# EAGLE board display (EAGLE 5.02)
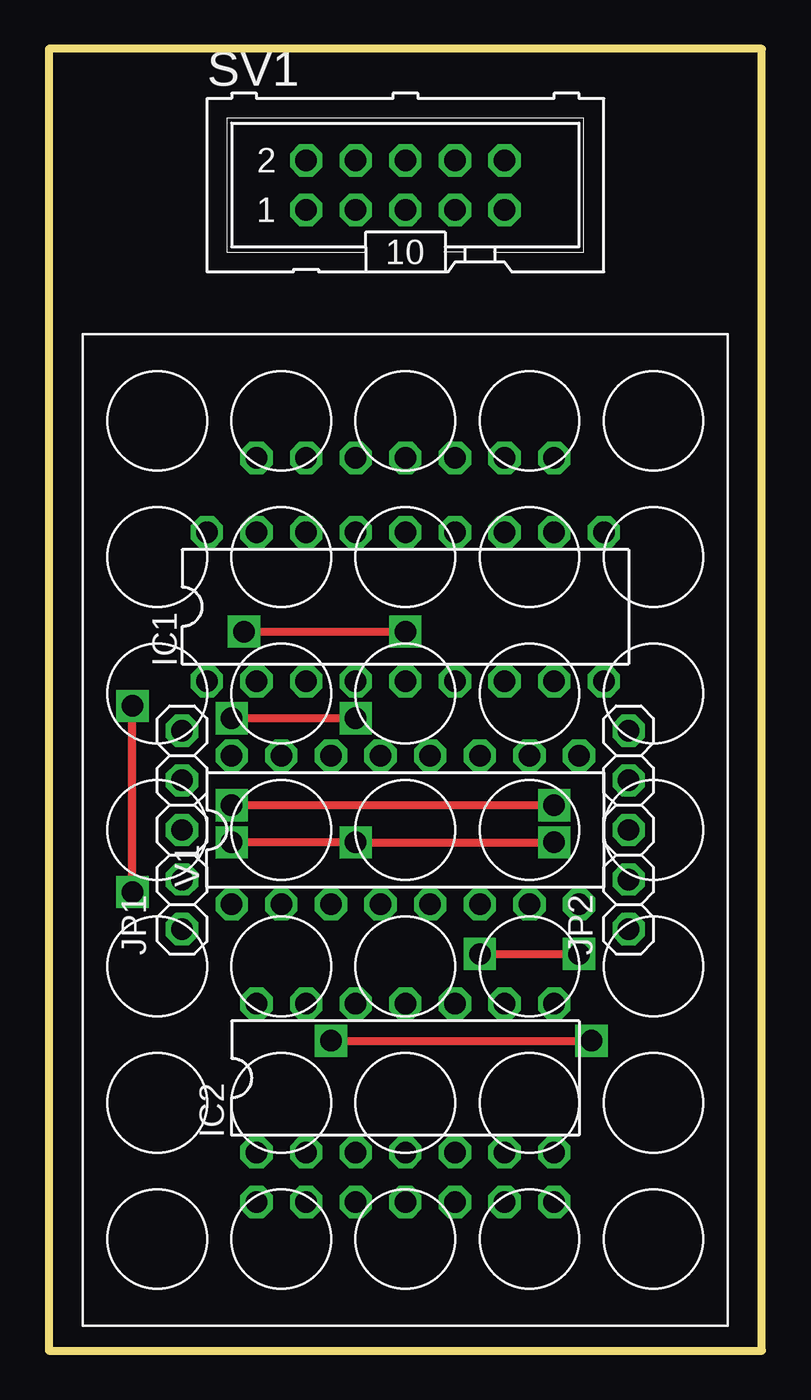
[diagram p0: board, top side]
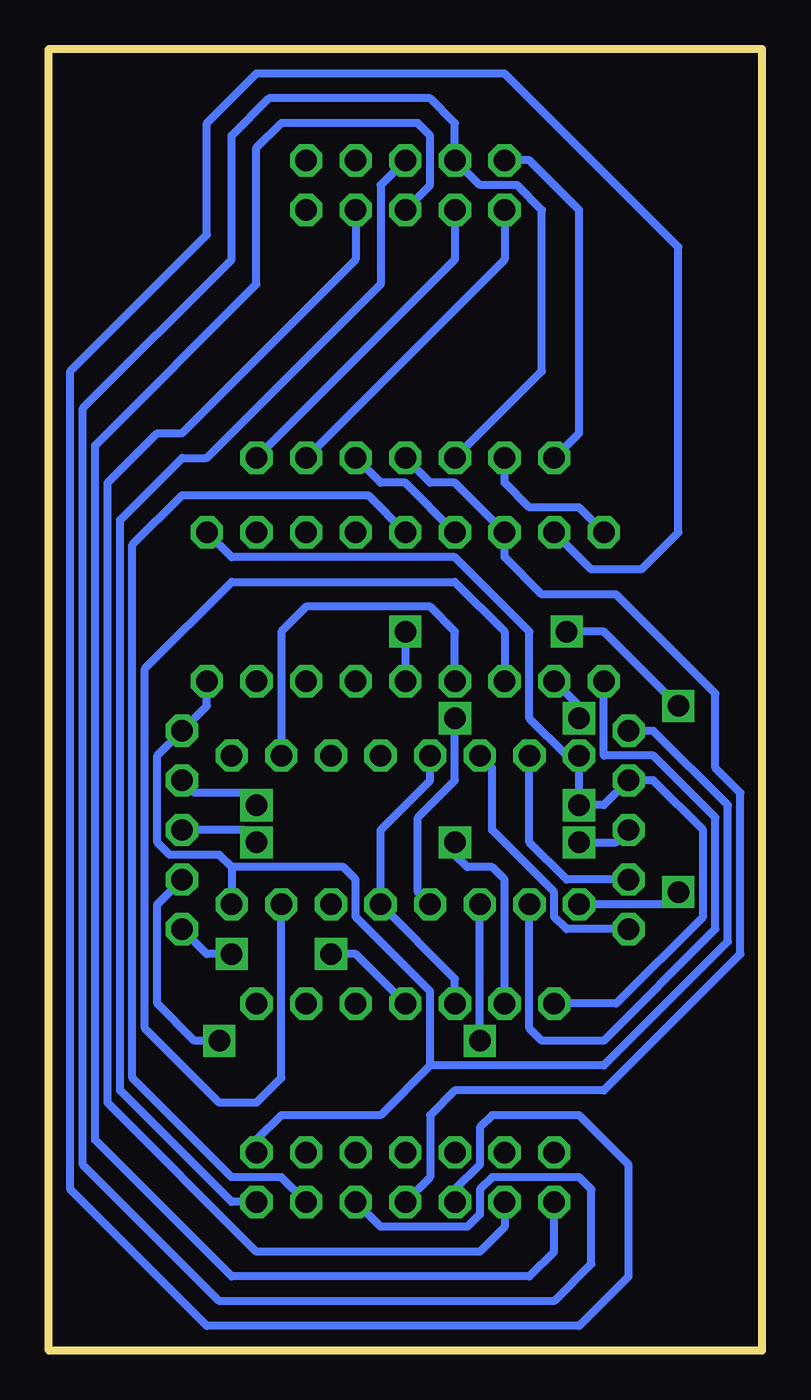
[diagram p1: board, bottom side, seen from below]

Size 36.5 x 66.67 mm. Coordinates in mm from the lower left corner, seen from the top.
Outline: 0,0 36.5,0 36.5,66.67 0,66.67 0,0
Copper layers (1*16): Top 0.035mm / dielectric 1.5mm / Bottom 0.035mm
Design rules "default": minimum track width 10mil, minimum drill 24mil, track to track 8mil, track to pad 8mil, pad to pad 8mil, via to via 8mil, smd to smd 8mil, copper to edge 40mil, drill to drill 8mil, minimum pad ring 10mil, minimum via ring 8mil, stop-mask expansion 4mil, vias tented up to drill 0mil, thermal gap 10mil

## Footprints (pad centres in the part's own frame; a part is rotated, then mirrored left to right if it is on the bottom)
DIL18 = drill 1.1 octagon: 1 -10.16,-3.81; 2 -7.62,-3.81; 3 -5.08,-3.81; 4 -2.54,-3.81; 5 0,-3.81; 6 2.54,-3.81; 7 5.08,-3.81; 8 7.62,-3.81; 9 10.16,-3.81; 10 10.16,3.81; 11 7.62,3.81; 12 5.08,3.81; 13 2.54,3.81; 14 0,3.81; 15 -2.54,3.81; 16 -5.08,3.81; 17 -7.62,3.81; 18 -10.16,3.81
DIL14 = drill 1.1 octagon: 1 -7.62,-3.81; 2 -5.08,-3.81; 3 -2.54,-3.81; 4 0,-3.81; 5 2.54,-3.81; 6 5.08,-3.81; 7 7.62,-3.81; 8 7.62,3.81; 9 5.08,3.81; 10 2.54,3.81; 11 0,3.81; 12 -2.54,3.81; 13 -5.08,3.81; 14 -7.62,3.81
1X05 = drill 1.1 octagon: 1 -5.08,0; 2 -2.54,0; 3 0,0; 4 2.54,0; 5 5.08,0
ML10 = drill 1.1 octagon: 1 -5.08,-1.27; 2 -5.08,1.27; 3 -2.54,-1.27; 4 -2.54,1.27; 5 0,-1.27; 6 0,1.27; 7 2.54,-1.27; 8 2.54,1.27; 9 5.08,-1.27; 10 5.08,1.27
DTM57 = drill 1.1 octagon: 1 -7.62,-19.05; 2 -5.08,-19.05; 3 -2.54,-19.05; 4 0,-19.05; 5 2.54,-19.05; 6 5.08,-19.05; 7 7.62,-19.05; 8 7.62,19.05; 9 5.08,19.05; 10 2.54,19.05; 11 0,19.05; 12 -2.54,19.05; 13 -5.08,19.05; 14 -7.62,19.05
DIL16 = drill 1.1 octagon: 1 -8.89,-3.81; 2 -6.35,-3.81; 3 -3.81,-3.81; 4 -1.27,-3.81; 5 1.27,-3.81; 6 3.81,-3.81; 7 6.35,-3.81; 8 8.89,-3.81; 9 8.89,3.81; 10 6.35,3.81; 11 3.81,3.81; 12 1.27,3.81; 13 -1.27,3.81; 14 -3.81,3.81; 15 -6.35,3.81; 16 -8.89,3.81

## Placement (x,y rotation side)
IC1  [DIL18]  18.25,38.09 0 top
IC2  74AC08N  [DIL14]  18.25,13.96 0 top
JP1  [1X05]  6.82,26.66 90 top
JP2  [1X05]  29.68,26.66 90 top
SV1  [ML10]  18.25,59.69 0 top
U$1  DOTMATRIX  [DTM57]  18.25,26.66 0 top
V1  744017N  [DIL16]  18.25,26.66 0 top

## Library data of the parts
IC1 IC2 JP1 JP2 SV1 U$1 V1 = display

## Nets
+5V: IC1.10 IC2.14 JP1.4 JP2.4 V1.16
GND: IC1.9 IC2.7 JP1.5 JP2.5 V1.8
N$1: SV1.1 U$1.9
N$2: SV1.2 U$1.14
N$3: SV1.3 U$1.8
N$4: SV1.4 U$1.5 U$1.12
N$5: SV1.5 U$1.1
N$6: SV1.6 U$1.7
N$7: SV1.7 U$1.2
N$8: IC1.18 U$1.13
N$9: IC1.17 U$1.3
N$10: IC1.16 U$1.4 U$1.11
N$11: IC1.15 U$1.10
N$12: IC1.14 U$1.6
N$13: JP1.2 V1.15
N$15: IC2.13 JP1.3 JP2.3
N$16: JP1.1 V1.14
N$18: JP2.2 V1.3
N$20: IC2.12 V1.5 V1.13
N$21: IC2.11 JP2.1
N$22: IC1.1 V1.2
N$23: IC1.2 V1.4
N$24: IC1.3 V1.7
N$25: IC1.4 V1.10
N$26: IC1.5 V1.1

## Tracks (layer width: path | path; a pad name or v marks a point on that pad's centre or on a via)
+5V  (via drill 1.1)
  Top 0.406: v9.36,27.94 v25.87,27.94
  Bottom 0.406: v25.87,27.94 26.5,28.57 29.04,28.57 JP2.4 | JP1.4 8.09,27.94 v9.36,27.94 V1.16 10,30.48 11.9,32.38 11.9,36.83 15.71,40.63 27.14,40.63 IC1.10 | JP1.4 6.18,29.2 | JP1.4 5.55,29.2 3.01,26.66 3.01,22.22 7.46,17.77 IC2.14
GND
  Bottom 0.406: 27.14,24.76 27.78,25.39 30.32,25.39 30.95,26.03 30.95,30.48 JP2.5 28.41,33.02 IC1.9 | 27.14,24.76 V1.8 | 27.14,24.76 21.43,24.76 20.79,24.12 20.79,22.22 16.98,18.41 16.98,14.6 | 16.98,14.6 19.52,12.06 24.6,12.06 25.87,10.79 IC2.7 | 16.98,14.6 8.09,14.6 1.74,20.95 1.74,27.94 5.55,31.74 JP1.5
N$1
  Bottom 0.406: SV1.1 13.17,55.88 U$1.9
N$2
  Bottom 0.406: U$1.14 9.36,46.98 9.36,58.42 11.9,60.95 SV1.2
N$3
  Bottom 0.406: SV1.3 15.71,55.88 U$1.8
N$4
  Bottom 0.406: U$1.5 19.52,6.34 15.07,6.34 14.44,6.98 14.44,8.25 13.81,8.88 9.36,8.88 8.73,8.25 8.73,4.44 10.63,2.54 27.78,2.54 34.76,9.52 34.76,48.25 27.14,55.88 27.14,62.22 25.24,64.13 16.98,64.13 15.71,62.86 SV1.4 14.44,59.69 12.54,59.69 11.27,58.42 11.27,50.16 U$1.12
N$5
  Bottom 0.406: SV1.5 16.98,59.69 16.98,62.22 17.61,62.86 24.6,62.86 25.87,61.59 25.87,54.61 34.12,46.35 34.12,10.79 27.14,3.8 11.9,3.8 10.63,5.07 U$1.1
N$6
  Bottom 0.406: SV1.6 19.52,59.69 19.52,54.61 28.41,45.71 29.68,45.71 32.86,42.54 32.86,13.33 27.14,7.61 U$1.7
N$7
  Bottom 0.406: U$1.2 13.17,6.34 14.44,5.07 25.87,5.07 33.49,12.7 33.49,44.45 30.95,46.98 29.68,46.98 20.79,55.88 SV1.7
N$8
  Bottom 0.406: IC1.18 9.36,43.17 11.9,43.17 13.17,44.45 U$1.13
N$9
  Bottom 0.406: U$1.3 15.71,8.25 14.44,9.52 14.44,11.43 13.81,12.06 9.36,12.06 6.82,9.52 6.82,3.8 9.36,1.27 28.41,1.27 35.4,8.25 35.4,50.16 28.41,57.14 28.41,62.86 25.87,65.4 13.17,65.4 4.28,56.51 4.28,41.91 6.18,40 8.73,40 IC1.17
N$10
  Bottom 0.406: U$1.11 16.98,44.45 15.71,44.45 IC1.16 13.17,40.63 11.27,38.73 7.46,38.73 2.38,33.65 2.38,29.84 1.11,28.57 1.11,20.31 8.09,13.33 15.71,13.33 16.98,12.06 16.98,8.88 U$1.4
N$11
  Bottom 0.406: IC1.15 18.25,44.45 19.52,44.45 U$1.10
N$12
  Bottom 0.406: IC1.14 20.16,43.81 29.68,43.81 32.22,41.27 32.22,13.96 27.14,8.88 24.6,8.88 U$1.6
N$13
  Bottom 0.406: V1.15 11.9,26.03 10,24.12 JP1.2
N$15  (via drill 1.1)
  Top 0.406: v25.87,26.03 v15.71,26.03 v9.36,26.03
  Bottom 0.406: IC2.13 13.17,24.12 13.81,24.76 15.07,24.76 15.71,25.39 v15.71,26.03 | JP1.3 7.46,26.03 v9.36,26.03 | v25.87,26.03 26.5,26.66 JP2.3
N$16
  Bottom 0.406: JP1.1 10,21.59 10.63,22.22 10.63,23.49 13.81,26.66 13.81,29.84 V1.14
N$18  (via drill 1.1)
  Top 0.406: v14.44,15.87 v27.78,15.87
  Bottom 0.406: v14.44,15.87 V1.3 | JP2.2 30.95,22.85 30.95,17.77 29.04,15.87 v27.78,15.87
N$20
  Bottom 0.406: V1.13 16.98,29.2 19.52,26.66 V1.5 15.71,19.05 IC2.12
N$21  (via drill 1.1)
  Top 0.406: v22.06,20.31 v27.14,20.31
  Bottom 0.406: v27.14,20.31 28.41,20.31 JP2.1 | IC2.11 20.79,20.31 v22.06,20.31
N$22
  Bottom 0.406: IC1.1 8.09,30.48 5.55,30.48 2.38,27.3 2.38,21.59 8.09,15.87 11.27,15.87 11.9,16.51 V1.2
N$23  (via drill 1.1)
  Top 0.406: v15.71,32.38 v9.36,32.38
  Bottom 0.406: IC1.2 9.36,33.02 v9.36,32.38 | v15.71,32.38 15.71,29.2 17.61,27.3 17.61,23.49 V1.4
N$24
  Bottom 0.406: V1.7 24.6,13.96 25.87,12.7 27.78,12.7 31.59,16.51 31.59,34.92 27.14,39.37 15.71,39.37 13.17,36.83 IC1.3
N$25
  Bottom 0.406: IC1.4 15.71,36.83 16.98,38.09 23.33,38.09 24.6,36.83 V1.10
N$26  (via drill 1.1)
  Top 0.406: v4.28,23.49 v4.28,33.02 | v10,36.83 v18.25,36.83
  Bottom 0.406: v4.28,23.49 4.28,22.85 V1.1 | v4.28,33.02 8.09,36.83 v10,36.83 | v18.25,36.83 IC1.5